# EAGLE board Nusbio Flash Extension (EAGLE 9.6.2)

Size 44 x 50 mm. Coordinates in mm from the lower left corner, seen from the top.
Outline: 5,0 0,0 0,4
Outline: 39,0 44,0 44,5
Outline: 44,45 44,50 39,50
Outline: 6,50 0,50 0,45
Outline: 0,4 0,45
Outline: 0,45 arc-90 5,50 6,50
Outline: 6,50 39,50
Outline: 39,50 arc-90 44,45
Outline: 44,45 44,5
Outline: 44,5 arc-90 39,0
Outline: 39,0 5,0
Outline: 5,0 4,0 arc-90 0,4
Copper layers (1*16): Top 0.035mm / dielectric 1.5mm / Bottom 0.035mm
Design rules "default": minimum track width 10mil, minimum drill 24mil, track to track 8mil, track to pad 8mil, pad to pad 8mil, via to via 8mil, smd to smd 8mil, copper to edge 40mil, drill to drill 8mil, minimum pad ring 10mil, minimum via ring 8mil, stop-mask expansion 4mil, vias tented up to drill 0mil, thermal gap 10mil

## Footprints (pad centres in the part's own frame; a part is rotated, then mirrored left to right if it is on the bottom)
1X10-BIG = drill 1.016 pad 1.778 octagon: 1 -11.43,0; 2 -8.89,0; 3 -6.35,0; 4 -3.81,0; 5 -1.27,0; 6 1.27,0; 7 3.81,0; 8 6.35,0; 9 8.89,0; 10 11.43,0
1206 = smd 1.6 x 1.803: A -1.422,0; C 1.422,0
R1206 = smd 1.6 x 1.803: 1 -1.422,0; 2 1.422,0
SOIC8_208MIL = smd 0.6 x 2.2: 1 -1.905,-3.315; 2 -0.635,-3.315; 3 0.635,-3.315; 4 1.905,-3.315; 5 1.905,3.315; 6 0.635,3.315; 7 -0.635,3.315; 8 -1.905,3.315
SOLDERJUMPER_REFLOW = smd 1.168 x 1.6: 1 -0.762,0; 2 0.762,0

## Placement (x,y rotation side)
GPIO_IN  PINHD-1X10  [1X10-BIG]  22.35,2.38 180 top
GPIO_OUT  PINHD-1X10  [1X10-BIG]  22,48 0 top
LED_POWER  [1206]  6.39,16.81 180 top
R_4K  [R1206]  6.5,24.5 180 top
SOIC8_208MIL_EEPROM  [SOIC8_208MIL]  21.5,20 270 top
USE_CS_3  [SOLDERJUMPER_REFLOW]  36.5,16.5 0 top
USE_CS_4  [SOLDERJUMPER_REFLOW]  36.5,23.5 0 top

## Library data of the parts
GPIO_IN GPIO_OUT LED_POWER R_4K = adafruit
SOIC8_208MIL_EEPROM USE_CS_3 USE_CS_4 = microbuilder

## Nets
CS: SOIC8_208MIL_EEPROM.1 USE_CS_3.2 USE_CS_4.2
CS_3: GPIO_IN.4 GPIO_OUT.4 USE_CS_3.1
CS_4: GPIO_IN.5 GPIO_OUT.5 USE_CS_4.1
GND: GPIO_IN.10 GPIO_OUT.10 R_4K.1 SOIC8_208MIL_EEPROM.4
GPIO6: GPIO_IN.6 GPIO_OUT.6
GPIO7: GPIO_IN.7 GPIO_OUT.7
GPIO8: GPIO_IN.8 GPIO_OUT.8
MISO: GPIO_IN.3 GPIO_OUT.3 SOIC8_208MIL_EEPROM.2
MOSI: GPIO_IN.2 GPIO_OUT.2 SOIC8_208MIL_EEPROM.5
N$2: LED_POWER.C R_4K.2
SCK: GPIO_IN.1 GPIO_OUT.1 SOIC8_208MIL_EEPROM.6
VCC: GPIO_IN.9 GPIO_OUT.9 LED_POWER.A SOIC8_208MIL_EEPROM.3 SOIC8_208MIL_EEPROM.7 SOIC8_208MIL_EEPROM.8

## Tracks (layer width: path | path; a pad name or v marks a point on that pad's centre or on a via)
CS  (2 unrouted)
CS_3  (2 unrouted)
CS_4  (2 unrouted)
GND  (3 unrouted)
GPIO6  (1 unrouted)
GPIO7  (1 unrouted)
GPIO8  (1 unrouted)
MISO  (2 unrouted)
MOSI  (2 unrouted)
N$2  (1 unrouted)
SCK  (2 unrouted)
VCC  (5 unrouted)

## Text on the board
tNames: 3 CS | 4 CS | 5 CS | 6 CS | 7 CS | VCC | GND | 0 CLCK | 1 MOSI | 2 MISO | CS | VCC | MISO | HOLD | WP | CLK | GND | MOSI | + | 2 MISO | 1 MOSI | 0 CLCK | GND | VCC | 7 CS | 6 CS | 5 CS | 4 CS | 3 CS | C:/DVT/Fred.PCB/2023/MadeInTheUSB.Logo.Gray.50.bmp | C:/DVT/Fred.PCB/2023/MadeInTheUSB.Logo.Gray.50.bmp | C:/DVT/Fred.PCB/2023/Nusbio Flash Extension/MadeInTheUSB.Logo.Gray.bmp | C:/DVT/Fred.PCB/2023/Nusbio Flash Extension/Title.Logo.Gray.bmp
bNames: PCBv2 - 2023.03 | www.FredericTorres.com